# Altium PCB 80362201 Main v4.1.1.PcbDoc
Units mm, origin at the board's own origin, x right, y up, seen from the top; angles counter-clockwise.
Board outline 71.7 x 90.1 mm, 2 copper layers (Top Layer, Bottom Layer), stack 1.571 mm thick; 97 components, 61 nets, 324 pads, 171 vias.
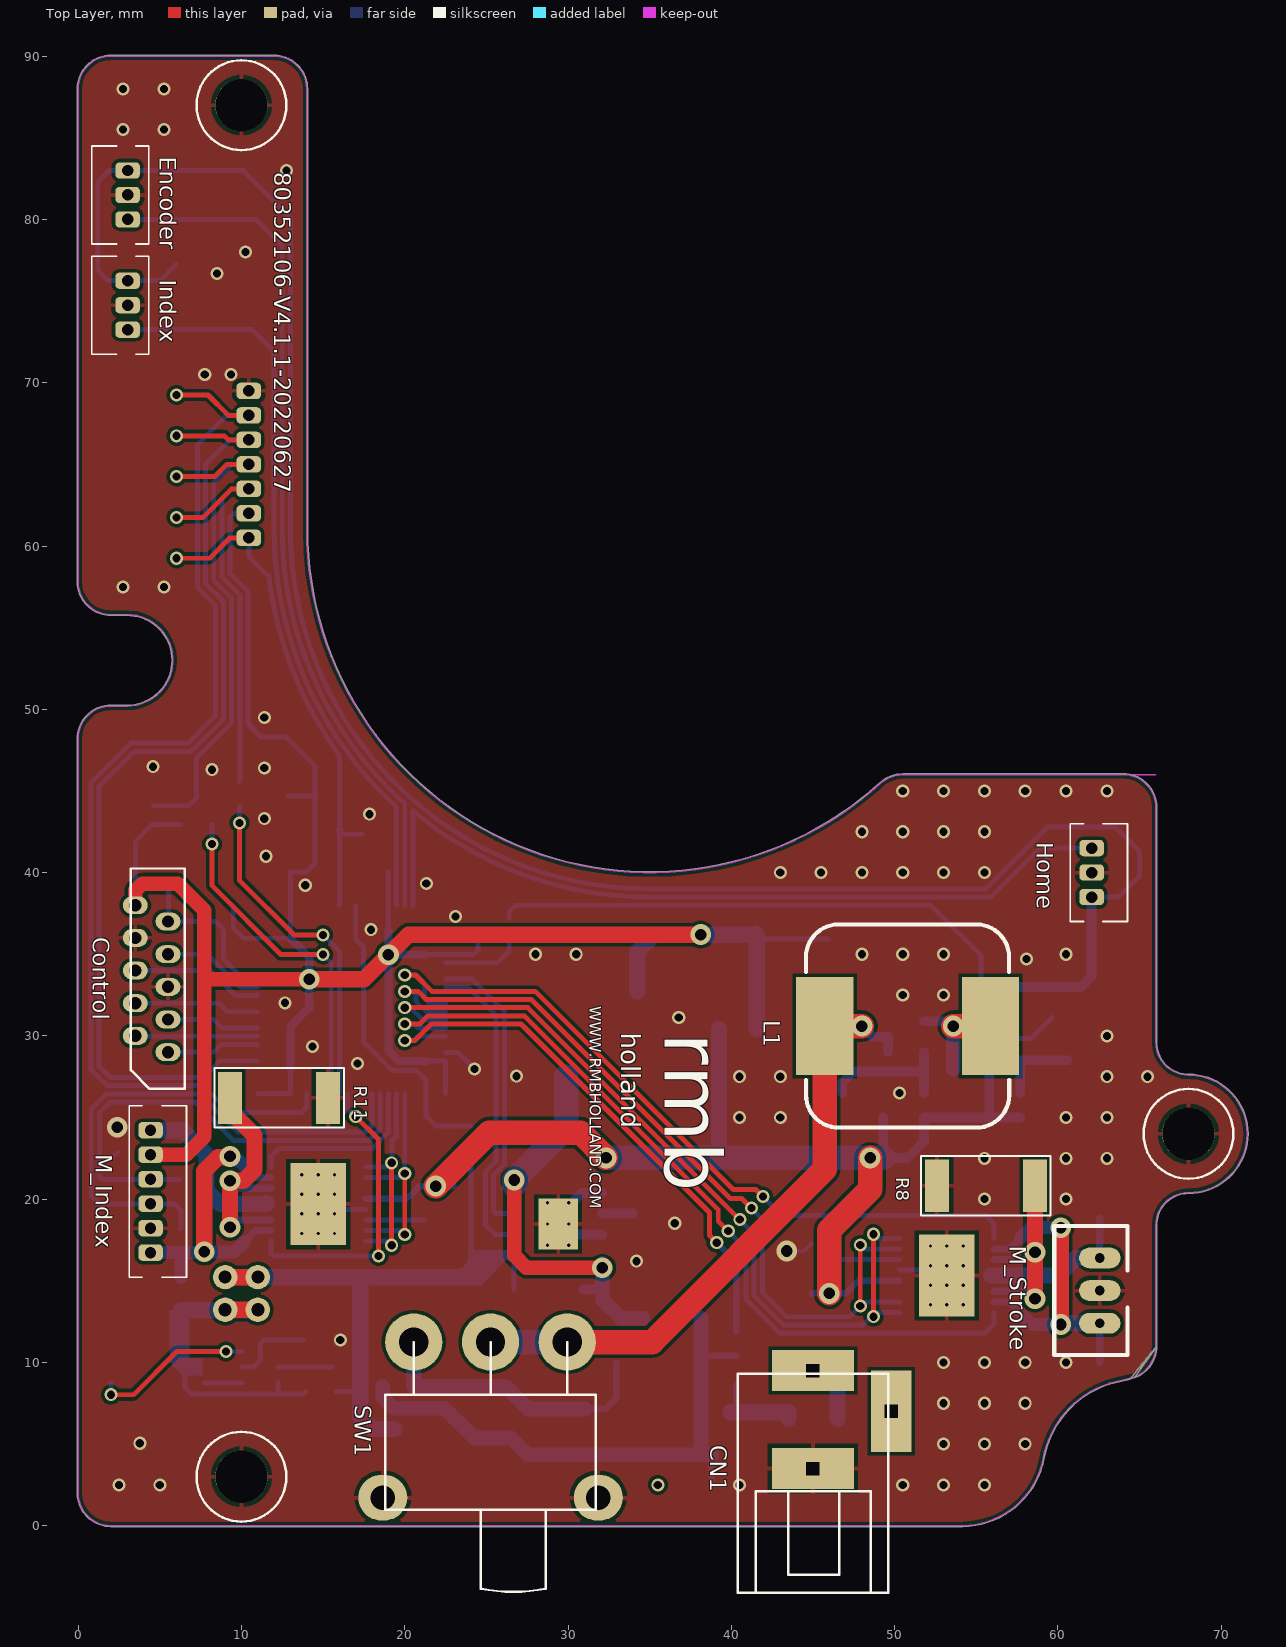
[diagram p0: Top Layer view]
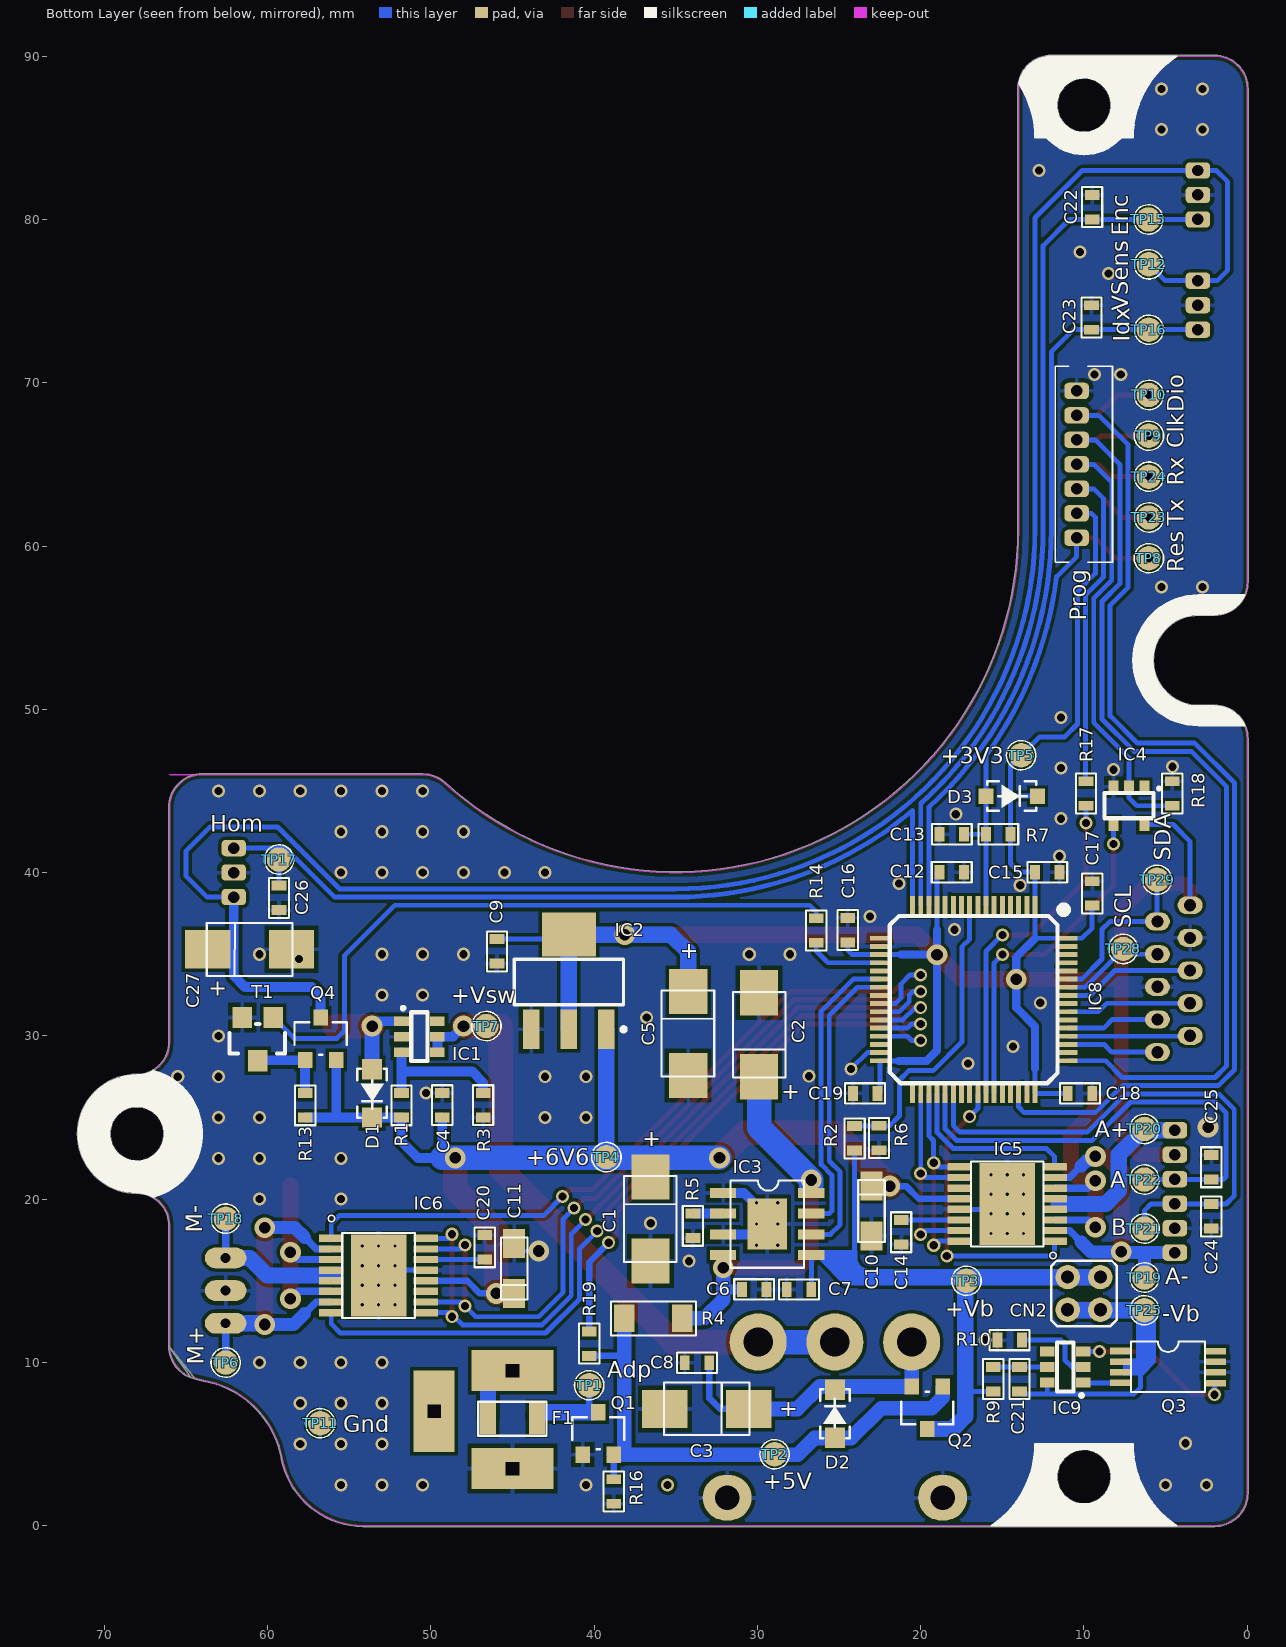
[diagram p1: Bottom Layer view, seen from below]
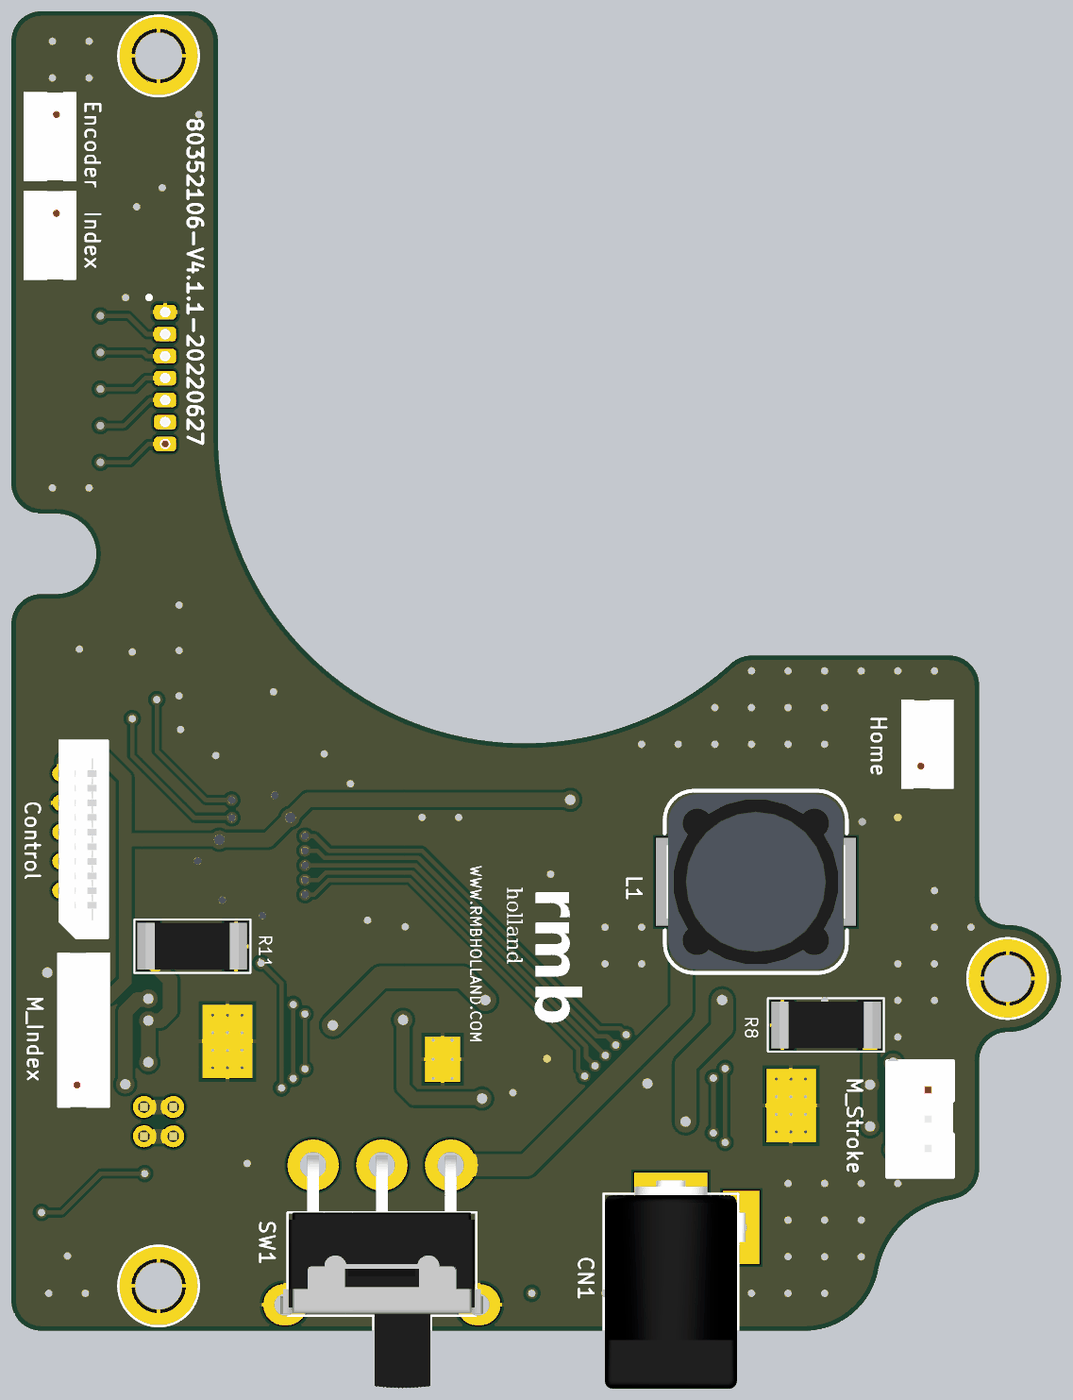
[diagram p2: 3D render of the assembled board from above, using the file's embedded part models]
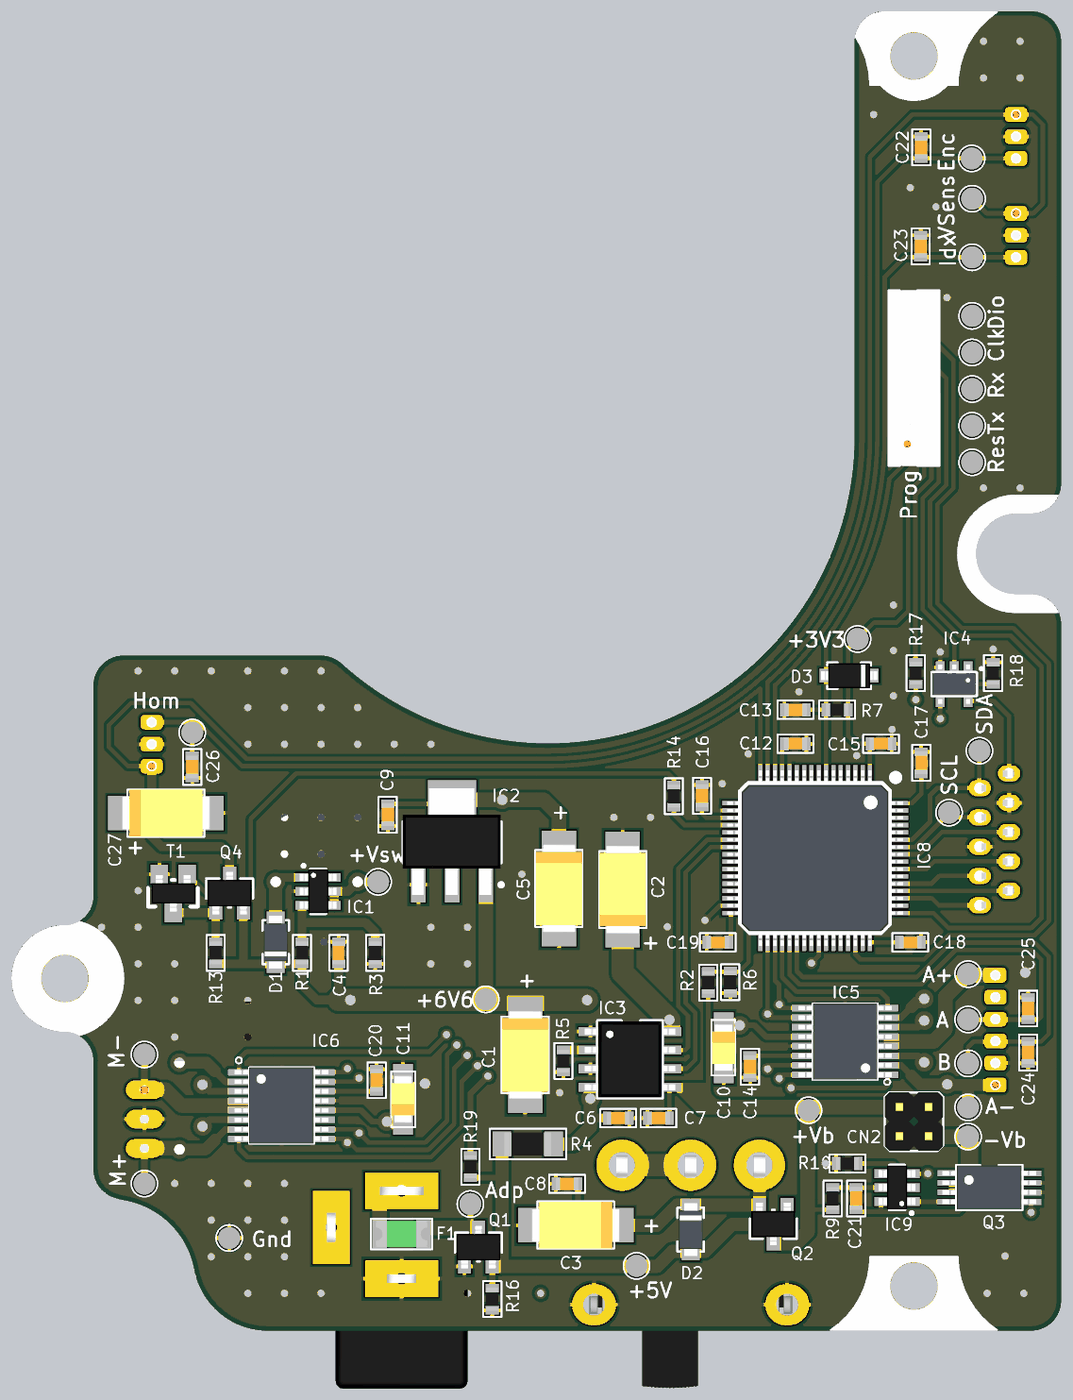
[diagram p3: 3D render of the assembled board from below, using the file's embedded part models]

## Layer stack, top to bottom
Top Solder: solder mask 0.0102, Solder Resist, Dk 3.5
Top Layer: signal copper 0.0356
Dielectric 1: dielectric 1.5, FR-4, Dk 4.8
Bottom Layer: signal copper 0.0356
Bottom Solder: solder mask 0.0102, Solder Resist, Dk 3.5

## Board outline
-0.05,48.2 cw(c2,48.2) 2,50.25 3,50.25 cw(c3,50.2) 3,50.25 ccw(c3.002,53) 5.751,53 ccw(c3.002,53) 3,55.75 cw(c3,55.8) 3,55.75 2,55.75 cw(c2,57.8) -0.05,57.8 -0.05,88 cw(c2,88) 2,90.05 12,90.05 cw(c12,88) 14.05,88 14.05,61 ccw(c14,61) 14.05,61 ccw(c35,61) 49.111,45.515 cw(c49.145,45.478) 49.112,45.516 cw(c50.551,43.847) 50.491,46.05 cw(c50.492,46) 50.492,46.05 64,46.05 cw(c64,46) 64.001,46.05 cw(c64,44) 66.05,44 cw(c66,44) 66.05,43.999 66.05,29.6 ccw(c68,29.6) 68,27.65 cw(c68,27.6) 68,27.65 cw(c68,24) 71.65,24 cw(c68,24) 68,20.35 ccw(c68,18.4) 66.05,18.4 66.05,11 cw(c66,11) 66.05,10.994 cw(c66,10.988) 66.05,10.994 cw(c64,10.988) 66.05,10.988 cw(c63,13.817) 64.683,9.055 63.918,8.85 cw(c63.909,8.9) 63.918,8.85 63.917,8.85 cw(c64.944,3.056) 63.917,8.85 63.918,8.85 ccw(c64.944,3.056) 59.167,4.174 cw(c59.117,4.184) 59.126,4.134 cw(c59.1,4.091) 59.151,4.091 cw(c59.1,4.091) 59.15,4.081 cw(c54.123,5.072) 54.184,-0.051 cw(c54.183,0) 54.176,-0.05 2,-0.05 cw(c2,2) -0.05,2

## Design rules (kind name [scope] priority, off if disabled: settings)
Clearance [All] p1: gap=0.2 ignorepadtopadclearanceinfootprint=FALSE
ComponentClearance [All] p1: gap=0 collisioncheckmode=3 verticalgap=0 showdistances=FALSE
HoleSize [All] p1: absolutevalues=TRUE maxlimit=3.5 minlimit=0.025 maxpercent=80.000 minpercent=20.000
HoleToHoleClearance [All] p1: gap=0.2 allowstackedmicrovias=TRUE
MinimumSolderMaskSliver [All] p1: minsoldermaskwidth=0
PolygonConnect [isvia] p1: thpad.connectstyle=Relief thpad.reliefconductorwidth=0.254 thpad.reliefentries=4 thpad.polygonreliefangle="90 Angle" thpad.airgapwidth=0.254 smdpad.connectstyle=Relief smdpad.reliefconductorwidth=0.254 smdpad.reliefentries=4 smdpad.polygonreliefangle="90 Angle" smdpad.airgapwidth=0.254 via.connectstyle=Direct via.reliefconductorwidth=0.254 via.reliefentries=4 via.polygonreliefangle="90 Angle" via.airgapwidth=0.254
PolygonConnect PolygonConnect_1 [All] p2: connectstyle=Relief reliefconductorwidth=0.254 reliefentries=4 polygonreliefangle="90 Angle" airgapwidth=0.254
RoomDefinition "80352106 Main v3.4.2" [InComponentClass('80352106 Main v3.4.2')] p1: confinementstyle=ConfineIn formatcopy=TRUE lockcomponents=FALSE outline -20,-6.9 71.475,-6.9 71.475,91.186 -20,91.186
RoutingVias [All] p1: holewidth=0.711 width=1.27 viastyle="Through Hole" minholewidth=0.5 minwidth=0.8 maxholewidth=0.711 maxwidth=1.27
SilkToSilkClearance [All] p1: silktosilkclearance=0
SilkToSolderMaskClearance [IsPad] p1: minsilkscreentomaskgap=0 clearancetoexposedcopper=TRUE
SolderMaskExpansion [All] p1: expansion=0.102 istentingtop=FALSE
Width [All] p1: maxlimit=1.5 minlimit=0.254 preferedwidth=0.254
24 further rules are at their usual default settings.

## Components (designator, comment, footprint, x,y, rotation, side; value= is the part's Value field where it differs from the comment)
C1 "220uF/10V" C/CAP_POL_6032-28 36.548,18.78 r90 bottom
C2 "220uF/10V" C/CAP_POL_6032-28 29.9,30.07 r270 bottom
C3 "220uF/10V" C/CAP_POL_6032-28 33.1,7.15 r180 bottom
C4 "1uF (105)" C/0603/H 49.3,25 r90 bottom
C5 "220uF/10V" C/CAP_POL_6032-28 34.242,30.149 r90 bottom
C6 "100nF (104)" C/0603/H 30.95,14.47 r180 bottom
C7 "10uF (106)" C/0603/H 26.7,14.47 r0 bottom
C8 "100nF (104)" C/0603/H 32.95,9.975 r0 bottom
C9 "100nF (104)" C/0603/H 45.95,35.925 r270 bottom
C10 "10uF/10V" C/CAP_POL_3216-18 23,19.275 r90 bottom
C11 "10uF/10V" C/CAP_POL_3216-18 44.9,15.75 r270 bottom
C12 "100nF (104)" C/0603/H 18.85,40.025 r180 bottom value=100p
C13 "10uF (106)" C/0603/H 17.345,42.35 r0 bottom
C14 "2.2uF (225)" C/0603/H 21.2,18.725 r270 bottom
C15 "100nF (104)" C/0603/H 13,40.025 r180 bottom
C16 "100nF (104)" C/0603/H 24.475,37.225 r270 bottom value=100p
C17 "100nF (104)" C/0603/H 9.5,39.475 r270 bottom
C18 "100nF (104)" C/0603/H 9.5,26.475 r0 bottom
C19 "100nF (104)" C/0603/H 22.65,26.475 r0 bottom value=100p
C20 "2.2uF (225)" C/0603/H 46.7,16.3 r90 bottom
C21 "100nF (104)" C/0603/H 13.95,9.725 r270 bottom
C22 "1nF (102)" C/0603/H 9.5,80 r90 bottom
C23 "1nF (102)" C/0603/H 9.537,73.25 r90 bottom
C24 "1nF (102)" C/0603/H 2.2,19.7 r270 bottom
C25 "1nF (102)" C/0603/H 2.2,21.2 r90 bottom
C26 "1nF (102)" C/0603/H 59.3,39.2 r270 bottom
C27 "220uF/10V" C/CAP_POL_6032-28 61.1,35.3 r0 bottom
CN1 "DC-005-2.5A-2.0" DC-005-2.5A-2.5 45,9.5 r0 top
CN2 "Header_Male_SMD_2x2P" Header2x2P_L10 9,13.225 r0 bottom
Control "0528061010" FPC_1.0-10P_STRAIGHT 5.5,29 r90 top
D1 "MBR230LSFT1G" SOD123LF 53.6,26.475 r270 bottom
D2 "MBR230LSFT1G" SOD123LF 25.254,6.85 r90 bottom
D3 "1N4148WS" SOD123 14.425,44.683 r180 bottom
Encoder "B3B-ZR" B3B-ZR 3.025,83 r270 top
F1 "FSMD150-1206R" F/1206R_PTC 45,6.55 r180 bottom
Home "B3B-ZR" B3B-ZR 62.069,38.5 r90 top
IC1 "MT3608" IC/SOT23-6L 50.7,29.95 r270 bottom
IC2 "AMS1117-3.3" SOT223/Rest 41.6,33.6 r270 bottom
IC3 "TP4056" HSOP-8 29.4,18.475 r180 bottom
IC4 "SN74LVC1G34DBVR" SOT753 7.25,44.1 r0 bottom
IC5 "DRV8833CPWPR" HTSSOP16 14.7,19.7 r0 bottom
IC6 "DRV8833CPWPR" HTSSOP16 53.2,15.325 r180 bottom
IC8 "STM32F103RCT6" LQFP64 16.75,32.225 r0 bottom
IC9 "DW01A" IC/SOT23-6L 11.15,9.725 r90 bottom
Index "B3B-ZR" B3B-ZR 3.025,76.25 r270 top
L1 "22uH/2A" COIL12X12 50.8,30.6 r90 top
M_Index "B6B-VH" B6B-ZR 4.431,16.725 r90 top
M_Stroke "B3B-PH-K-S" B3B-PH-KL 62.569,16.4 r270 top
Prog "B7B-ZR" B7B-ZR 10.45,60.5 r90 bottom
Q1 "SSM3J332R" SOT23-F 39.75,5.65 r270 bottom
Q2 "SSM3J332R" SOT23-F 19.604,7.225 r90 bottom
Q3 "FS8205A" TSSOP-8 4.85,9.725 r180 bottom
Q4 "SSM3J332R" SOT23-F 56.75,29.825 r270 bottom
R1 "11KΩ (1102) ±1%" R/0603/H 51.8,26.5 r270 bottom
R2 "9.1KΩ (9101) ±1%" R/0603/H 24.05,24.475 r270 bottom
R3 "1.5KΩ (1501) ±1%" R/0603/H 46.8,25 r90 bottom
R4 "0.0Ω (0R0) ±5%" R/1206/b 34.6,12.7 r0 bottom
R5 "1.5KΩ (152) ±5%" R/0603/H 33.949,17.615 r90 bottom
R6 "33KΩ (3302) ±1%" R/0603/H 22.55,23 r90 bottom
R7 "10KΩ (103) ±5%" R/0603/H 16,42.35 r180 bottom
R8 "0.2Ω (0R2) ±1%" R/2512 55.6,20.825 r0 top
R9 "100Ω (101) ±5%" r/0603/H 15.55,8.225 r90 bottom
R10 "1KΩ (102) ±5%" r/0603/H 15.303,11.368 r180 bottom
R11 "0.2Ω (0R2) ±1%" R/2512 12.3,26.2 r180 top
R13 "1KΩ (102) ±5%" R/0603/H 57.7,26.5 r270 bottom
R14 "1KΩ (102) ±5%" R/0603/H 26.4,35.7 r90 bottom
R16 "10KΩ (103) ±5%" R/0603/H 38.8,1.35 r90 bottom
R17 "100Ω (101) ±5%" r/0603/H 9.875,44.095 r90 bottom
R18 "10KΩ (103) ±5%" r/0603/H 4.595,44.095 r90 bottom
R19 "10KΩ (103) ±5%" r/0603/H 40.3,10.4 r90 bottom
SW1 "MS12AAH1/MS12ASG30" NKK_MS12AAH1 25.254,11.25 r0 top
T1 "BC817-40" T/NPN/TO23 60.6,29.8 r90 bottom
TP1 "Adp" TestPoint1.2 40.3,8.6 r180 bottom
TP2 "+5V" TESTPOINT1.2 28.95,4.375 r180 bottom
TP3 "+Vb" TESTPOINT1.2 17.2,15 r180 bottom
TP4 "+6V6" TESTPOINT1.2 39.25,22.575 r180 bottom
TP5 "+3V3" TESTPOINT1.2 13.85,47.183 r180 bottom
TP6 "M+" TestPoint1.2 62.569,9.994 r90 bottom
TP7 "+Vsw" TESTPOINT1.2 46.6,30.6 r180 bottom
TP8 "Res" TESTPOINT1.2 6.025,59.25 r0 bottom
TP9 "Clk" TESTPOINT1.2 6.025,66.75 r270 bottom
TP10 "Dio" TESTPOINT1.2 6.025,69.25 r270 bottom
TP11 "Gnd" TESTPOINT1.2 56.775,6.275 r180 bottom
TP12 "VSens" TESTPOINT1.2 6.025,77.25 r90 bottom
TP15 "Enc" TESTPOINT1.2 6.054,80 r90 bottom
TP16 "Idx" TESTPOINT1.2 6.025,73.25 r90 bottom
TP17 "Hom" TESTPOINT1.2 59.3,40.8 r90 bottom
TP18 "M-" TestPoint1.2 62.569,18.806 r90 bottom
TP19 "A-" TestPoint1.2 6.3,15.2 r90 bottom
TP20 "A+" TestPoint1.2 6.3,24.3 r90 bottom
TP21 "B" TestPoint1.2 6.3,18.2 r90 bottom
TP22 "A" TestPoint1.2 6.3,21.2 r90 bottom
TP23 "Tx" TestPoint1.2 6.025,61.75 r270 bottom
TP24 "Rx" TestPoint1.2 6.025,64.25 r270 bottom
TP25 "-Vb" TestPoint1.2 6.3,13.2 r90 bottom
TP28 "SCL" TestPoint1.2 7.6,35.325 r90 bottom
TP29 "SDA" TestPoint1.2 5.525,39.555 r90 bottom

## Footprints (in the part's own frame and the unit in brackets; to place one, negate y for a bottom-side part, rotate by r counter-clockwise, add the part's x,y. Pads: shape width x height; smd on the part's side, far side on the other; paste and mask are expansions set on the pad)
B3B-PH-KL [mm]
  oval 1.27x2.54 hole 0.6: 1(0,0) 2(2,0) 3(4,0)
  silkscreen extent -1.95,-2.8 5.95,1.7, body extent -1.95,-2.8 5.95,1.7, height 6
B3B-ZR [mm]
  rrect50% 1x1.5 hole 0.7: 1(0,0) 2(1.5,0) 3(3,0)
  silkscreen extent -1.5,-2.2 4.5,1.3, body extent -1.5,-2.2 4.5,1.3, height 4.5
B6B-ZR [mm]
  rrect50% 1x1.5 hole 0.7: 1(0,0) 2(1.5,0) 3(3,0) 4(4.5,0) 5(6,0) 6(7.5,0)
  silkscreen extent -1.5,-2.2 9,1.3, body extent -1.5,-2.2 9,1.3, height 4.5
B7B-ZR [mm]
  rrect50% 1x1.5 hole 0.7: 1(0,0) 2(1.5,0) 3(3,0) 4(4.5,0) 5(6,0) 6(7.5,0) 7(9,0)
  silkscreen extent -1.5,-2.2 10.5,1.3, body extent -1.5,-2.2 10.5,1.3, height 4.5
C/0603/H [mm]
  rect 0.6x0.9 smd: 1(0,0) 2(1.5,0)
  silkscreen extent -0.47,-0.62 1.98,0.62, body extent -0.03,-0.42 1.52,0.43, height 0.65
C/CAP_POL_3216-18 [mm]
  rect 1.78x1.35 smd: 1(-1.525,0) 2(1.525,0)
  silkscreen extent -1.9,-0.8 1.9,0.82, body extent -1.6,-0.8 1.6,0.8, height 1.63
C/CAP_POL_6032-28 [mm]
  rect 2.77x2.35 smd: 1(-2.57,0) 2(2.57,0)
  silkscreen extent -2.63,-1.6 2.63,1.63, body extent -3,-1.6 3,1.6, height 2.63
COIL12X12 [mm]
  rect 6x3.5 smd: 1(0,5.08) 2(0,-5.08)
  silkscreen extent -6.22,-6.22 6.22,6.23, body extent -6,-6.1 6,6.1, height 7.8
DC-005-2.5A-2.5 [mm]
  rect 5x2.5 hole 0.8 square: 1(0,0) 2(0,-6)
  rect 2.5x5 hole 0.8 square: 3(4.8,-2.5)
  silkscreen extent -4.6,-13.6 4.6,-0.2, body extent -4.5,-13.5 5.1,0.7, height 11
F/1206R_PTC [mm]
  rect 1x1.9 smd: 1(-1.5,0) 2(1.5,0)
  silkscreen extent -2.1,-1.04 2.09,1.04, body extent -1.75,-0.9 1.75,0.9, height 0.53
FPC_1.0-10P_STRAIGHT [mm]
  oval 1.1x1.524 hole 0.75: 1(0,0) 2(1,2) 3(2,0) 4(3,2) 5(4,0) 6(5,2) 7(6,0) 8(7,2) 9(8,0) 10(9,2)
  silkscreen extent -2.25,-1.02 11.25,2.27, body extent -2.25,-1.02 11.25,2.28, height 5.4
Header2x2P_L10 [mm]
  round 1.5 hole 0.8: 1(0,0) 2(0,-2) 3(2,-2) 4(2,0)
  silkscreen extent -1,-3 3,1, body extent -1,-3 3,1, height 7.2
HSOP-8 [mm]
  rect 1.6x0.61 smd: 1(-2.7,1.905) 2(-2.7,0.635) 3(-2.7,-0.635) 4(-2.7,-1.905) 5(2.7,-1.905) 6(2.7,-0.635) 7(2.7,0.635) 8(2.7,1.905)
  rect 2.4x3.1 smd paste-5 mask+0.05: G(0,0)
  rect 2.4x3.1 smd far side paste-5 mask+0.05: G(0,0)
  silkscreen extent -2.25,-2.68 2.25,2.68, body extent -3.09,-2.6 3.11,2.6, height 1.66
HTSSOP16 [mm]
  rrect10% 1.5x0.45 smd mask+0.05: 1(-2.9,2.275) 2(-2.9,1.625) 3(-2.9,0.975) 4(-2.9,0.325) 5(-2.9,-0.325) 6(-2.9,-0.975) 7(-2.9,-1.625) 8(-2.9,-2.275) 9(2.9,-2.275) 10(2.9,-1.625) 11(2.9,-0.975) 12(2.9,-0.325) 13(2.9,0.325) 14(2.9,0.975) 15(2.9,1.625) 16(2.9,2.275)
  rect 3.4x5 smd paste-5 mask+0.05: 17(0,0)
  rect 3.4x5 smd far side paste-5 mask+0.05: 17(0,0)
  silkscreen extent -2.23,-2.6 2.23,2.61, body extent -3.2,-2.6 3.2,2.6, height 1.2
IC/SOT23-6L [mm]
  rect 0.6x0.9 smd: 1(-0.95,-1.1) 2(0,-1.1) 3(0.95,-1.1) 4(0.95,1.1) 5(0,1.1) 6(-0.95,1.1)
  silkscreen extent -1.82,-1.08 1.5,0.5, body extent -1.5,-1.25 1.5,1.25, height 1.1
LQFP64 [mm]
  rect 0.3x1.2 smd: 1(-3.75,-5.75) 2(-3.25,-5.75) 3(-2.75,-5.75) 4(-2.25,-5.75) 5(-1.75,-5.75) 6(-1.25,-5.75) 7(-0.75,-5.75) 8(-0.25,-5.75) 9(0.25,-5.75) 10(0.75,-5.75) 11(1.25,-5.75) 12(1.75,-5.75) 13(2.25,-5.75) 14(2.75,-5.75) 15(3.25,-5.75) 16(3.75,-5.75) 33(3.75,5.75) 34(3.25,5.75) 35(2.75,5.75) 36(2.25,5.75) 37(1.75,5.75) 38(1.25,5.75) 39(0.75,5.75) 40(0.25,5.75) 41(-0.25,5.75) 42(-0.75,5.75) 43(-1.25,5.75) 44(-1.75,5.75) 45(-2.25,5.75) 46(-2.75,5.75) 47(-3.25,5.75) 48(-3.75,5.75)
  rect 1.2x0.3 smd: 17(5.75,-3.75) 18(5.75,-3.25) 19(5.75,-2.75) 20(5.75,-2.25) 21(5.75,-1.75) 22(5.75,-1.25) 23(5.75,-0.75) 24(5.75,-0.25) 25(5.75,0.25) 26(5.75,0.75) 27(5.75,1.25) 28(5.75,1.75) 29(5.75,2.25) 30(5.75,2.75) 31(5.75,3.25) 32(5.75,3.75) 49(-5.75,3.75) 50(-5.75,3.25) 51(-5.75,2.75) 52(-5.75,2.25) 53(-5.75,1.75) 54(-5.75,1.25) 55(-5.75,0.75) 56(-5.75,0.25) 57(-5.75,-0.25) 58(-5.75,-0.75) 59(-5.75,-1.25) 60(-5.75,-1.75) 61(-5.75,-2.25) 62(-5.75,-2.75) 63(-5.75,-3.25) 64(-5.75,-3.75)
  silkscreen extent -5.7,-5.7 5.15,5.13, body extent -6,-6 6,6, height 1.6
NKK_MS12AAH1 [mm]
  round 3.5 hole 1.8: 1(4.7,0) 2(0,0) 3(-4.7,0)
  oval 3x2.8 hole 1.5: G(-6.6,-9.53) G(6.6,-9.53)
  silkscreen extent -6.45,-15.3 6.45,0, body extent -6.93,-15.23 6.93,0.64, height 7.3
R/0603/H [mm]
  rect 0.6x0.9 smd: 1(0,0) 2(1.5,0)
  silkscreen extent -0.47,-0.62 1.98,0.62, body extent -0.03,-0.42 1.52,0.43, height 0.45
r/0603/H [mm]
  rect 0.6x0.9 smd: 1(0,0) 2(1.5,0)
  silkscreen extent -0.47,-0.62 1.98,0.62, body extent -0.03,-0.42 1.52,0.43, height 0.45
R/1206/b [mm]
  rect 1.25x1.7 smd: 1(0,0) 2(3.55,0)
  silkscreen extent -0.84,-1.04 4.37,1.04, body extent 0.18,-0.79 3.38,0.81, height 0.53
R/2512 [mm]
  rect 1.475x3.2 smd: 1(-3,0) 2(3,0)
  silkscreen extent -3.98,-1.83 3.95,1.83, body extent -3.17,-1.6 3.18,1.6, height 0.58
SOD123 [mm]
  rect 0.9x0.95 smd: A(-1.575,0) K(1.575,0)
  silkscreen extent -1.5,-0.9 1.5,0.9, body extent -1.92,-0.85 1.93,0.85, height 1.1
SOD123LF [mm]
  rect 1.25x1.22 smd: A(-1.475,0) K(1.475,0)
  silkscreen extent -1.5,-0.9 1.5,0.9, body extent -1.8,-0.83 1.8,0.83, height 0.95
SOT23-F [mm]
  rect 1x0.9 smd: D(-1.3,0) G(1.3,-0.95) S(1.3,0.95)
  silkscreen extent -1,-1.6 0.97,1.6, body extent -1.45,-1.5 1.45,1.5, height 1.05
SOT223/Rest [mm]
  rect 2.4x1 smd: 1(3.2,-2.25) 2(3.2,0.05) 3(3.2,2.35)
  rect 2.7x3.3 smd: 2(-2.6,0.05)
  silkscreen extent -1.1,-3.3 3.32,3.52, body extent -3.4,-3.33 3.9,3.37, height 1.8
SOT753 [mm]
  rect 0.6x0.8 smd: 1(-0.95,-1.15) 2(0,-1.15) 3(0.95,-1.15) 4(0.95,1.15) 5(-0.95,1.15)
  silkscreen extent -1.9,-1.1 1.5,0.77, body extent -1.48,-1.35 1.48,1.35, height 1.1
T/NPN/TO23 [mm]
  rect 1.3x1.2 smd: B(1.325,-0.95) C(-1.325,0) E(1.325,0.95)
  silkscreen extent -0.89,-1.67 0.92,1.73, body extent -1.23,-1.5 1.27,1.5, height 1.1
TestPoint1.2 [mm]
  round 1.5 smd: 1(0,0)
  silkscreen extent -0.9,-0.9 0.9,0.9
TESTPOINT1.2 [mm]
  round 1.5 smd: 1(0,0)
  silkscreen extent -0.9,-0.9 0.9,0.9
TSSOP-8 [mm]
  rect 1.35x0.4 smd mask+0.05: 1(-2.875,0.975) 2(-2.875,0.325) 3(-2.875,-0.325) 4(-2.875,-0.975) 5(2.866,-0.988) 6(2.866,-0.338) 7(2.866,0.312) 8(2.866,0.962)
  silkscreen extent -2.27,-1.55 2.27,1.55, body extent -3.2,-1.5 3.2,1.5, height 1.2

## Part data
C1 C2 C3 C5 C10 C11 C27: library part C/CAP_Pol, "CapacitorPol", Size="Ø15x33 Pitch 8"
C4 C6 C7 C8 C9 C13 C14 C15 C17 C18 C20 C21 C22 C23 C24 C25 C26: library part CAP, "Capacitor"
  C4 C6 C7 C8 C9 C14 C20 C21 C22 C23 C24 C25 C26: Size=SMD1206
C12 C16 C19: library part "Capacitor non polarized", "Capacitor non polarized", Case/Format=0603, Manufacturer=Generic, Tolerance=10%, Type="SMD Chip Capacitor"
CN1: library part DC_Power_Jack, "XKB_DC-005-2.5A-2.0_Power jack", Brand=E-Switch
CN2: library part CON2*2, "Connector", Brand=Molex
Control: library part CON10, "Molex_0528061010_FPC 1.0 10P Connector", System=Connector
D1: library part DIODE_SHOTTKY, "Diode", Brand="OnSemi or similar", Size="DO41 Pitch 10"
D2: library part DIODE_SHOTTKY, "ON semiconductor_MBR230LSFT1G_Diode", Brand="OnSemi or similar", Size="DO41 Pitch 10"
D3: library part DIODE, "Diode", Brand="OnSemi or similar", Size="DO41 Pitch 10"
Encoder Home Index M_Stroke: library part CON3, "Connector", Brand="JST or similar"
F1: library part PTC, "Fuzetec PTC fuse 2.5 A 16V", Brand="LittelFuse or similar", Size="Pitch 10mm"
IC1: library part IC/MT3608, "Aerosemi_MT3608_Boost converter", Brand="TI or similar", Size=SOP8
IC2: library part IC/ASM1117-SOT223, "AMS_AMS1117-3.3_Voltage regulator", Brand="AMS-Semitec or similar", Size=SOT223
IC3: library part IC/TP4056, "Top power_TP4056-42-SOP8-PP_18650 charger", Brand="TI or similar", Size=SOP8
IC4: library part LogicLevelShifter, "Bus buffer", Brand=TI, Dimension=SOT753
IC5 IC6: library part IC/DRV8833CPWPR, "TI_DRV8833CPWPR_DC/Stepper motor driver", Brand=TI, Size=HSOP8
IC8: library part IC/STM32F100RBT6, "ST_STM32F103RCT6_Microprocessor"
IC9: library part IC/DW01A, "Protection circuit", Brand="ST or similar", Size=SO8
L1: library part INDUCTOR1, "INDUCTOR", Size=SMD1206
M_Index: library part CON6, "Connector", Brand="JST or similar"
Prog: library part CON7, "Connector", Brand="JST or similar"
Q1: library part MOSFET-P-CHANNEL, "Toshiba_SSM3J332R_P-Channel MOSFET", Brand="ST or similar", Size=TO220
Q2: library part MOSFET-P-CHANNEL, "N-Channel MOSFET", Brand="ST or similar", Size=TO220
Q3: library part MOSFET-N-P-DUAL, "N-P-Channel MOSFET", Brand="ST or similar", Size=SO8
Q4: library part MOSFET-P-CHANNEL, "P-Channel MOSFET", Brand=AOS, Dimension=SOT23
R1 R2 R3 R4 R5 R6 R9 R10 R13 R14 R17 R18 R19: library part RES, "Resistor"
  R1 R2 R3 R4 R5 R6 R9 R10: coding=11201312000153, name=贴片电阻, Size=SMD1206
  R13 R14 R17 R18 R19: Brand=YAGEO/relac/walsin, Dimension=0603
R7 R8 R11 R16: library part RES
SW1: library part SW-SPDT, "NKK_MS12AAH1/MS12ASG30_Slide switch", Brand=E-Switch
T1: library part T/NPN, "Transistor NPN", Brand=DC, Dimension=TO23
TP1 TP2 TP3 TP4 TP5 TP6 TP7 TP8 TP9 TP10 TP11 TP12 TP15 TP16 TP17 TP18 TP19 TP20 TP21 TP22 TP23 TP24 TP25 TP28 TP29: library part TestPoint

## Free pads (board coordinates)
  round 3.2 hole 3.2: ""(10,87) ""(10,3) ""(68,24)

## Via types
v1: diameter 0.8, hole 0.5, Top Layer to Bottom Layer, tented both sides, 115 vias
v2: diameter 0.2, hole 0.2, Top Layer to Bottom Layer, 30 vias
v3: diameter 1.27, hole 0.711, Top Layer to Bottom Layer, tented both sides, 21 vias
v4: diameter 0.8, hole 0.5, Top Layer to Bottom Layer, tented top, 5 vias

## Nets (pads, with @x,y where several pads share a name; then routed paths per layer and width w, separated by ;. In a path a pad name is that pad's centre, name@x,y a point inside that pad or via, vN(x,y) a via of type N, cw(c..) or ccw(c..) an arc to the next point about the centre after c; other vN are vias at no path point)
+3V3: C5.2 C9.1 C12.1 C15.1 C16.2 C17.2 C18.2 C19.1 Control.10 D3.K IC2.2 IC4.5 IC8.1 IC8.13 IC8.19 IC8.32 IC8.48 IC8.64 M_Index.5 Prog.2 R7.2 TP5.1 | length 155.2
  Top Layer w0.9: Control.10 3.5,38.9 3.925,39.325 6.1,39.325 7.725,37.7 7.725,23.825 6.625,22.725 M_Index.5 ; 8,33.475 v3@14.148,33.475
  Top Layer w1: v3@14.148,33.475 17.5,33.475 v3(19,34.975) 20.226,36.201 v3(38.124,36.201)
  Bottom Layer w0.3: Control.10 3.5,41.9 4.55,42.95 IC4.5 ; C17.2 9.5,36.6 10.125,35.975 IC8.64 13,35.975 IC8.1 C15.1 13.975,40.025 14.5,40.55 R7.2 14.5,44.683 ; Prog.2 9.55,62 9.3,61.75 9.3,58.321 10.4,57.221 10.4,49.1 11.2,48.3 12.733,48.3 TP5.1 14.5,46.533 14.5,44.683 ; C18.2 IC8.48 13,28 ; D3.K 14.5,44.683 ; 19,36.5 19,37.437 IC8.13 C12.1@19,40.025 ; 21.2,34.975 IC8.19 24.2,34.975 24.475,35.25 C16.2 ; 21.35,28.467 21.955,28.467 21.962,28.475 IC8.32 C19.1@22.5,26.475 ; IC2.2@41.498,36.252 IC2.2@41.524,36.226 ; IC2.2@42,35.925 C9.1
  Bottom Layer w0.5: 13,28 13,30.575 14.15,31.725 14.15,34.825 13,35.975 ; 19,36.5 v3(19,34.975) ; 21.2,34.977 19.002,34.977 v3(19,34.975) ; 21.35,28.467 19.633,28.467 19,29.1 v3(19,34.975)
  Bottom Layer w1: C5.2 34.242,35.142 35.3,36.2 v3(38.124,36.201) 41.445,36.2 IC2.2@41.498,36.252 ; IC2.2@41.524,36.226 41.55,36.2 IC2.2@41.55,30.4
  other v3: 14.148,33.473
+5V: C1.2 C4.1 C10.2 C11.2 D1.K IC2.3 IC5.12 IC6.12 Q4.S R1.2 R13.2 TP4.1 | length 74.4
  Top Layer w1.5: v3(21.9,20.8) 25.18,24.08 30.77,24.08 v3(32.325,22.525) ; v3(46,14.225) 46,18.1 48.5,20.6 v3(48.5,22.525)
  Bottom Layer w0.4: IC5.12 20.125,20.025 20.9,20.8 v3(21.9,20.8) v3@21.925,20.8 ; v3@22,20.725 v3@21.925,20.8 ; C10.2 v3@21.925,20.8 ; C11.2 v3@45.975,14.225 ; v3(46,14.225) 47,14.225 47.775,15 IC6.12
  Bottom Layer w0.6: C4.1 49.3,22.525 50.8,22.525 51.8,23.525 R1.2 D1.K 55.8,25 ; Q4.S@55.8,28.5 55.8,25 ; R13.2 55.8,25
  Bottom Layer w1: TP4.1 IC2.3
  Bottom Layer w1.5: v3(32.325,22.525) TP4.1@39.2,22.525 ; TP4.1 TP4.1@39.2,22.525 ; 49.3,22.525 v3(48.5,22.525) TP4.1@39.2,22.525
+Vadp: D2.A Q1.S Q2.G R4.2 R16.2 R19.1 TP2.1 | length 34.3
  Bottom Layer w0.4: 38.15,10.4 R19.1 ; R16.2 Q1.S
  Bottom Layer w0.9: Q2.G 18.654,7.871 19.325,7.2 22.425,7.2 24.25,5.375 D2.A 26.5,5.375 27.525,4.35 38.15,4.35 ; R4.2 38.15,10.4 38.15,4.35 ; Q1.S 38.15,4.35
A: C25.1 IC8.37 M_Index.4 TP22.1 | length 29.8
  Bottom Layer w0.3: TP22.1@6.2,21.2 4.431,21.2 1.476,21.2 1.3,21.376 1.3,25.292 1.956,25.948 7.152,25.948 9.5,23.6 17.807,23.6 18.5,24.293 IC8.37
A1: IC5.9 IC5.16 IC8.35 | length 12.8
  Top Layer w0.3: v1(19.2,17.175) v1(19.2,22.225)
  Bottom Layer w0.3: IC5.16 18.95,17.425 v1(19.2,17.175) ; IC5.9 18.95,21.975 19.214,22.239 19.214,23.589 19.5,23.875 IC8.35
A2: IC5.10 IC5.15 IC8.34 | length 13.7
  Top Layer w0.3: v1(20,17.825) v1(20,21.575)
  Bottom Layer w0.3: IC5.15 19.75,18.075 v1(20,17.825) ; IC5.10 19.75,21.325 v1(20,21.575) IC8.34
Adp: F1.2 Q1.D TP1.1 | length 5.6
  Bottom Layer w0.4: 40.3,6.95 TP1.1
  Bottom Layer w1: Q1.D@39.95,6.95 40.3,6.95 43.5,6.95 F1.2
B: C24.1 IC8.38 M_Index.3 TP21.1 | length 33
  Bottom Layer w0.3: TP21.1 6.3,19.3 5.9,19.7 4.431,19.7 C24.1 1.3,19.7 0.8,20.2 0.8,25.499 1.749,26.448 7.452,26.448 7.5,26.4 9.8,24.1 17.6,24.1 18,24.5 IC8.38
B-: C21.2 CN2.1 CN2.4 IC9.6 Q3.2 Q3.3 TP25.1 | length 16.4
  Top Layer w1: CN2.1 CN2.4
  Bottom Layer w0.3: 6.55,9.855 6.55,8.46 6.935,8.075 12.25,8.075 ; IC9.6 12.25,8.075 ; C21.2 13.8,8.075 13.475,8.075 12.25,8.075
  Bottom Layer w1: TP25.1 9,13.2 10.975,13.2 CN2.4
BattVoltage: IC8.9 R2.1 R6.2 | length 18.5
  Bottom Layer w0.3: IC8.9 17,35.925 17.475,35.45 17.475,29.625 19.233,27.867 20.733,27.867 21.3,27.3 21.3,25.1 21.925,24.475 22.55,24.475 R2.1
Charging: IC3.7 IC8.22 | length 18.2
  Bottom Layer w0.3: IC8.22 24.125,33.475 26.1,31.5 26.1,22.129 25.438,21.467 25.438,19.286 25.614,19.11 IC3.7
FaultIdx: IC5.8 IC8.36 | length 10.8
  Bottom Layer w0.3: IC5.8 11.8,22.6 12.3,23.1 17.4,23.1 18.014,23.1 19,24.086 IC8.36
FaultStr: IC6.8 IC8.28 | length 50.1
  Top Layer w0.3: v1(20,30.725) 20.918,30.725 21.418,31.225 27.329,31.225 39.2,19.354 39.2,18.654 39.719,18.135 v1(39.814,18.039)
  Bottom Layer w0.3: v1(20,30.725) 20.575,30.725 20.825,30.475 IC8.28 ; v1(39.814,18.039) 40.9,16.954 40.9,13.876 42.976,11.8 55.54,11.8 56.1,12.36 IC6.8
GND: C1.1 C2.1 C3.1 C4.2 C5.1 C6.2 C7.2 C8.2 C9.2 C10.1 C11.1 C12.2 C13.2 C14.2 C15.2 C16.1 C17.1 C18.1 C19.2 C20.2 C22.2 C23.2 C24.2 C25.2 C26.2 C27.1 CN1.2 Control.5 Control.8 Encoder.2 Home.2 IC1.2 IC2.1 IC3.1 IC3.3 IC3.G IC4.3 IC5.13 IC5.17 IC6.13 IC6.17 IC8.12 IC8.18 IC8.31 IC8.47 IC8.60 IC8.63 Index.2 M_Index.2 M_Stroke.2 pad. Prog.7 Q1.G Q3.6 Q3.7 R3.1 R5.1 R6.1 R8.1 R10.1 R11.1 R16.1 R18.2 SW1.G T1.E TP11.1 | length 12.6
  Bottom Layer w0.254: v3(43.4,16.825) 44.45,16.825 C11.1
  Bottom Layer w0.3: C25.2 2.25,22.7 C25.2@2.4,22.85 ; IC5.17@15.433,19.375 IC5.13 ; IC8.31 23.275,28.975 v1(24.275,27.975) ; IC6.13 IC6.17@51.625,15.65
  Bottom Layer w0.6: IC3.G@29.6,17.84 IC3.3 ; IC3.G@30,19.55 30.83,20.38 IC3.1
  other v1: 2.5,2.5 5,2.5 40.5,2.5 50.5,2.5 53,2.5 55.5,2.5 53,5 55.5,5 58,5 3.775,5.05 53,7.5 55.5,7.5 58,7.5 53,10 55.5,10 58,10 60.5,10 16.053,11.368 34.2,16.2 36.535,18.522 55.5,20 60.5,20 55.5,22.5 60.5,22.5 63,22.5 40.5,25 43,25 60.5,25 63,25 50.298,26.5 40.5,27.5 43,27.5 63,27.5 65.5,27.5 26.85,27.53 17.1,28.3 14.35,29.35 63,30 36.783,31.119 12.675,32.025 50.5,32.5 53,32.5 58.07,34.7 28,35 30.5,35 48,35 50.5,35 53,35 60.5,35 17.931,36.503 23.1,37.301 13.907,39.226 21.32,39.338 43,40 45.5,40 48,40 50.5,40 53,40 55.5,40 11.5,41 48,42.5 50.5,42.5 53,42.5 55.5,42.5 11.4,43.3 17.85,43.575 50.5,45 53,45 55.5,45 58,45 60.5,45 63,45 8.2,46.3 11.4,46.4 4.586,46.486 11.4,49.5 2.75,57.5 5.25,57.5 7.75,70.5 9.35,70.5 8.5,76.7 10.25,78 12.75,83 2.75,85.5 5.25,85.5 2.75,88 5.25,88
  other v2: 52.2,13.525 53.2,13.525 54.2,13.525 52.2,14.725 53.2,14.725 54.2,14.725 52.2,15.925 53.2,15.925 54.2,15.925 52.2,17.125 53.2,17.125 54.2,17.125 28.75,17.175 30.05,17.175 13.7,17.9 14.7,17.9 15.7,17.9 28.75,18.475 30.05,18.475 13.7,19.1 14.7,19.1 15.7,19.1 28.75,19.775 30.05,19.775 13.7,20.3 14.7,20.3 15.7,20.3 13.7,21.5 14.7,21.5 15.7,21.5
  other v3: 2.4,24.4
I2C1-SCL: Control.7 IC8.58 TP28.1 | length 6.3
  Bottom Layer w0.3: Control.7 7.9,35 9.925,32.975 IC8.58
I2C1-SDA: Control.9 IC8.59 TP29.1 | length 10.6
  Bottom Layer w0.3: TP29.1 5.525,38.03 5.525,37 8.425,37 8.9,36.525 8.9,34.707 10.132,33.475 IC8.59
Idx+: IC5.4 IC5.5 M_Index.6 TP20.1 | length 10.3
  Bottom Layer w1: M_Index.6 6.375,24.225 7.863,22.737 7.863,20.506 8.668,19.7 11.5,19.7 11.55,19.75
Idx-: IC5.2 IC5.7 M_Index.1 TP19.1 | length 19.5
  Top Layer w1: v3(7.725,16.775) 7.725,21.725 8.563,22.563 9.248,22.563 v3(9.3,22.615)
  Bottom Layer w0.45: 10.168,17.368 10.875,18.075 IC5.2 ; 10.168,22.032 10.875,21.325 IC5.7
  Bottom Layer w0.8: M_Index.1@4.331,16.625 M_Index.1 6.3,16.725 ; TP19.1 6.3,16.725 ; v3(9.3,22.615) 9.427,22.615 9.682,22.36 9.84,22.36 10.168,22.032 ; 10.168,17.368 9.575,16.775 v3(7.725,16.775) 7.675,16.725 6.3,16.725
IntEncoder: C22.1 Encoder.3 IC8.15 TP15.1 | length 52.7
  Bottom Layer w0.3: Encoder.3 TP15.1 8.227,80 C22.1 10.9,80 12.5,78.4 12.5,61.002 ccw(c35,61) 20,44.229 IC8.15
IntHome: C26.1 Home.3 IC8.16 TP17.1 | length 51.5
  Bottom Layer w0.3: IC8.16 20.5,43.795 ccw(c35,61) 35,38.5 55.894,38.5 58.894,41.5 Home.3 ; C26.1 TP17.1
IntIndex: C23.1 IC8.14 Index.3 TP16.1 | length 45.6
  Bottom Layer w0.3: Index.3 TP16.1 8.037,73.25 C23.1 10.65,73.25 12,71.9 12,61.002 ; 12,61 ccw(c35,61) 19.5,44.007 IC8.14
MotFWD: IC6.9 IC6.16 IC8.27 | length 50.4
  Top Layer w0.3: v1(20,31.725) 27.543,31.725 v1(40.522,18.747) ; v1(48.7,12.8) v1(48.7,17.85)
  Bottom Layer w0.3: v1(20,31.725) 20.341,31.725 21.091,30.975 IC8.27 ; v1(40.522,18.747) 41.4,17.868 41.4,14.083 43.183,12.3 48.065,12.3 48.565,12.8 v1(48.7,12.8) 48.95,13.05 IC6.9 ; v1(48.7,17.85) 48.95,17.6 IC6.16
MotREV: IC6.10 IC6.15 IC8.26 | length 51.1
  Top Layer w0.3: v1(20,32.725) 20.829,32.725 21.329,32.225 27.75,32.225 39.934,20.041 40.641,20.041 v1(41.229,19.454) ; v1(47.9,13.45) v1(47.9,17.2)
  Bottom Layer w0.3: v1(20,32.725) 20.475,32.725 20.7,32.5 20.7,32.1 21.325,31.475 IC8.26 ; v1(41.229,19.454) 41.9,18.782 41.9,14.29 43.39,12.8 47.25,12.8 v1(47.9,13.45) 48.15,13.7 IC6.10 ; v1(47.9,17.2) 48.15,16.95 IC6.15
NetC2_2: C2.2 C6.1 IC3.4 IC3.8 R4.1 | length 24.7
  Top Layer w0.9: v3(26.701,21.174) 26.7,16.55 27.45,15.8 v3(32.1,15.8)
  Bottom Layer w0.6: C6.1@30.95,14.475 32.1,14.475
  Bottom Layer w0.9: v3@32.1,16.075 v3(32.1,15.8) 32.1,14.475 32.1,13.85 33.25,12.7 R4.1
  Bottom Layer w1.5: v3@26.7,20.854 v3(26.701,21.174) 29.9,24.374 C2.2
NetC3_2: C3.2 C8.1 D2.K Q2.S SW1.3 | length 18.6
  Bottom Layer w0.4: C3.2 32.281,7.151 32.95,7.821 C8.1 ; C3.2@31.03,7.15 C3.2@31.031,7.151
  Bottom Layer w0.9: SW1.3 Q2.S 25.254,8.525 26.175,8.525 27.55,7.15 C3.2@31.03,7.15
NetC14_1: C14.1 IC5.14 | length 3.6
  Bottom Layer w0.3: IC5.14 C14.1
NetC20_1: C20.1 IC6.14 | length 3.6
  Bottom Layer w0.3: C20.1 IC6.14
NetC21_1: C21.1 IC9.5 R9.2 | length 3.3
  Bottom Layer w0.3: IC9.5 C21.1 R9.2
NetCN1_1: CN1.1 F1.1 | length 2.5
  Bottom Layer w1: F1.1 CN1.1@46.5,9.1
NetD1_A: D1.A IC1.1 L1.2 | length 6.9
  Top Layer w1.5: v3(53.6,30.6) L1.2
  Bottom Layer w0.6: IC1.1 53.3,30.9 v3(53.6,30.6)
  Bottom Layer w0.9: D1.A v3(53.6,30.6)
NetIC1_3: IC1.3 R1.1 R3.2 | length 8.4
  Bottom Layer w0.6: R3.2 46.8,27.15 47.461,27.811 51.8,27.811 ; R1.1 51.8,27.811 ; IC1.3 51.8,27.811
NetIC1_4: IC1.4 IC1.5 L1.1 SW1.1 SW1.2 TP7.1 | length 40.2
  Top Layer w1.5: SW1.2 SW1.2@25.254,11.375 ; SW1.1 35.15,11.25 45.72,21.82 L1.1 v3(48,30.6)
  Bottom Layer w0.6: TP7.1 v3(48,30.6) 48.65,29.95 IC1.5 IC1.4
  Bottom Layer w1.5: SW1.2 SW1.1
NetIC3_2: IC3.2 R5.2 | length 1.9
  Bottom Layer w0.6: IC3.2 32.105,19.115 R5.2
NetIC5_3: IC5.3 IC5.6 R11.2 | length 15
  Top Layer w1: v3(9.3,18.275) v3(9.3,21.125) 10.125,21.125 10.8,21.8 10.8,23.9 9.3,25.4 R11.2
  Bottom Layer w0.45: v3(9.3,18.275) 9.75,18.725 IC5.3 ; v3(9.3,21.125) 9.75,20.675 IC5.6
NetIC6_2: IC6.2 IC6.7 M_Stroke.3 TP6.1 | length 20.1
  Top Layer w1: v3(60.175,12.325) v3(60.175,18.25)
  Bottom Layer w0.45: IC6.7 57.025,13.7 57.732,12.993 ; IC6.2 57.025,16.95 57.732,17.657 ; TP6.1 M_Stroke.3
  Bottom Layer w0.8: 57.732,12.993 58.4,12.325 v3(60.175,12.325) ; 57.732,17.657 58.325,18.25 v3(60.175,18.25)
  Bottom Layer w1: v3@60.1,12.4 M_Stroke.3
NetIC6_3: IC6.3 IC6.6 R8.2 | length 12.3
  Top Layer w1: v3(58.6,13.9) v3(58.6,16.75) R8.2
  Bottom Layer w0.45: IC6.6 58.15,14.35 v3(58.6,13.9) ; IC6.3 58.15,16.3 v3(58.6,16.75)
NetIC6_4: IC6.4 IC6.5 M_Stroke.1 TP18.1 | length 9.5
  Bottom Layer w0.45: M_Stroke.1 TP18.1
  Bottom Layer w1: 55.9,15.325 60.025,15.325 61.1,16.4 M_Stroke.1
NetIC8_29: IC8.29 R19.2 | length 34.4
  Top Layer w0.3: v1(20,29.725) 20.625,29.725 21.625,30.725 27.122,30.725 38.662,19.185 38.662,17.777 v1(39.107,17.332)
  Bottom Layer w0.3: v1(20,29.725) 20.557,29.725 20.807,29.975 IC8.29
  Bottom Layer w0.4: v1@39.1,17.34 40.3,16.14 R19.2
NetIC9_1: IC9.1 Q3.4 | length 2.3
  Bottom Layer w0.3: Q3.4 IC9.1@10.05,8.75
NetIC9_2: IC9.2 R10.2 | length 5
  Bottom Layer w0.3: IC9.2 10.75,9.725 11.16,10.136 11.16,11.136 11.393,11.368 R10.2
NetIC9_3: IC9.3 Q3.5 | length 9.9
  Top Layer w0.3: v1(2.004,8.023) 3.398,8.023 6.05,10.675 v1(9.05,10.675)
  Bottom Layer w0.3: Q3.5 2.004,8.717 v1(2.004,8.023) ; v1(9.05,10.675) IC9.3
NetQ4_G: Q4.G R13.1 T1.C | length 4.9
  Bottom Layer w0.6: R13.1 57.7,28.5 T1.C@60.6,28.5
NetR14_2: R14.2 T1.B | length 40.4
  Bottom Layer w0.3: R14.2 26.4,37.6 26.8,38 52.2,38 55.3,34.9 55.3,30.3 55.752,29.848 58.373,29.848 T1.B
NRST: C13.1 D3.A IC8.7 Prog.1 R7.1 TP8.1 | length 30.4
  Top Layer w0.3: v4(6.025,59.25) 8.05,59.25 9.3,60.5 Prog.1
  Bottom Layer w0.3: Prog.1 10.45,59.349 11.677,58.122 ccw(c35,61) 16,47.17 D3.A 16,42.6 R7.1 C13.1 C13.1@17.4,42.35 ; IC8.7 R7.1
  Bottom Layer w0.4: R7.1@16,42.6 R7.1@16.05,42.65
Rx: IC4.4 IC8.43 | length 21
  Top Layer w0.3: v1(8.2,41.743) 8.2,39.2 12.425,34.975 v1(15,34.975)
  Bottom Layer w0.3: v1(8.2,41.743) IC4.4 ; v1(15,34.975) 15.5,34.475 IC8.43
SensorsOn: IC8.20 R14.1 | length 4.7
  Bottom Layer w0.3: IC8.20 25.675,34.475 26.4,35.2 R14.1
SleepIdx: IC5.1 IC8.41 | length 18.1
  Top Layer w0.3: v1(17,25.05) 18.4,23.65 v1(18.4,16.525)
  Bottom Layer w0.3: IC5.1 11.8,16.701 11.976,16.525 v1(18.4,16.525) ; IC8.41 16.5,25.55 v1(17,25.05)
SleepStr: IC6.1 IC8.25 | length 47
  Top Layer w0.3: v1(20,33.725) 20.657,33.725 21.657,32.725 27.982,32.725 40.117,20.591 41.506,20.591 v1(41.936,20.161)
  Bottom Layer w0.3: v1(20,33.725) 20.666,33.725 21.2,33.191 21.2,32.325 21.55,31.975 IC8.25 ; v1(41.936,20.161) 43.097,19 55.6,19 56.1,18.5 IC6.1
Standby: IC3.6 IC8.23 | length 18.9
  Bottom Layer w0.3: IC8.23 23.872,32.975 25.6,31.247 25.6,22.336 24.938,21.674 24.938,18.437 25.535,17.84 IC3.6
SWCLK: IC8.49 Prog.5 TP9.1 | length 60.8
  Top Layer w0.3: v4(6.025,66.75) 8.95,66.75 9.2,66.5 Prog.5
  Bottom Layer w0.3: Prog.5 9.3,66.5 7.8,65 7.8,57.7 8.9,56.6 8.9,49.393 6.932,47.425 3.425,47.425 1.278,45.278 1.278,28.146 1.976,27.448 7.648,27.448 8.675,28.475 IC8.49
SWCommon1: Control.4 IC8.55 | length 7.7
  Bottom Layer w0.3: Control.4 8.6,32 9.125,31.475 IC8.55
SWCommon2: Control.2 IC8.52 | length 7.5
  Bottom Layer w0.3: Control.2@3.5,29.975 IC8.52
SWDIO: IC8.46 Prog.6 TP10.1 | length 68.1
  Top Layer w0.3: v4(6.025,69.25) 7.95,69.25 9.2,68 Prog.6
  Bottom Layer w0.3: Prog.6 9.1,68 7.3,66.2 7.3,57.472 8.4,56.372 8.4,49.6 6.725,47.925 3.218,47.925 0.778,45.485 0.778,27.939 1.769,26.948 7.659,26.948 9.307,25.3 13.654,25.3 14,25.646 IC8.46
SWMenuLeft: Control.1 IC8.51 | length 5.7
  Bottom Layer w0.3: Control.1 8.3,29 8.775,29.475 IC8.51
SWOkRight: Control.3 IC8.53 | length 5.7
  Bottom Layer w0.3: Control.3 8.267,31 8.792,30.475 IC8.53
SWUpDown: Control.6 IC8.57 | length 8.1
  Bottom Layer w0.3: Control.6 8.1,34 9.625,32.475 IC8.57
Tx: IC8.42 R17.1 | length 21.2
  Top Layer w0.3: v1(9.875,43.045) 9.875,39.525 13.218,36.182 v1(15,36.182)
  Bottom Layer w0.3: v1(9.875,43.045) R17.1 ; v1(15,36.182) 16,35.182 IC8.42
USART1-Rx: IC4.2 Prog.4 R18.1 TP24.1 | length 30.9
  Top Layer w0.3: v4(6.025,64.25) 8.35,64.25 9.1,65 Prog.4
  Bottom Layer w0.3: R18.1 6.77,44.095 7.25,44.575 IC4.2 7.25,47.036 9.4,49.186 9.4,56.807 8.3,57.907 8.3,63.9 9.4,65 Prog.4
USART1-Tx: Prog.3 R17.2 TP23.1 | length 24.8
  Top Layer w0.3: v4(6.025,61.75) 7.65,61.75 9.4,63.5 Prog.3
  Bottom Layer w0.3: R17.2 9.9,45.62 9.9,57.014 8.8,58.114 8.8,62.9 9.4,63.5 Prog.3
V_Sens: C27.2 Encoder.1 Home.1 Index.1 Q4.D TP12.1 | length 127
  Bottom Layer w0.3: TP12.1 5.025,76.25 Index.1 1.85,76.25 1.2,76.9 1.2,82.3 1.9,83 Encoder.1 10.1,83 13,80.1 13,61 ccw(c35,61) 35,39 55.594,39 59.394,42.8 63.5,42.8 65,41.3 65,39.8 63.7,38.5 Home.1
  Bottom Layer w0.6: Q4.D@56.75,31.15 56.75,32.45 57.3,33 61.4,33 62.069,33.669 Home.1
Vbat: C7.1 CN2.2 CN2.3 IC3.5 Q2.D R2.2 R9.1 TP3.1 | length 41.7
  Top Layer w1: CN2.2 CN2.3
  Bottom Layer w0.3: R9.1@15.8,8.225 17.275,8.225 ; 24.05,15 24.05,16.57 ; R2.2 24.05,16.57 ; C7.1 IC3.5 24.05,16.57
  Bottom Layer w1: CN2.2 CN2.3 17.2,15.225 23.825,15.225 ; TP3.1@17.275,14.925 17.275,8.225 17.275,6.7 18.05,5.925 Q2.D@19.375,5.925
pads on no net: CN1.3 IC1.6 IC4.1 IC5.11 IC6.11 IC8.2 IC8.3 IC8.4 IC8.5 IC8.6 IC8.8 IC8.10 IC8.11 IC8.17 IC8.21 IC8.24 IC8.30 IC8.33 IC8.39 IC8.40 IC8.44 IC8.45 IC8.50 IC8.54 IC8.56 IC8.61 IC8.62 IC9.4 Q3.1 Q3.8
copper on no net:
  other v1: 35.5,2.5

## Polygon pours and split planes (outlines as drawn)
GND on Top Layer "TL_GND" (solid, pour order 2): 0,2 0,48.2 cw(c2,48.2) 2,50.2 2.8,50.2 ccw(c2.852,53) 2.9,55.8 2,55.8 cw(c2,57.8) 0,57.8 0,88 cw(c2,88) 2,90 12,90 cw(c12,88) 14,88 14,61 ccw(c35,61) 49.145,45.478 cw(c50.551,43.848) 50.492,46 64,46 cw(c64.001,44.001) 66,44 66,29.65 ccw(c68.056,29.65) 67.947,27.598 cw(c68.001,23.999) 68,20.4 ccw(c68.051,18.348) 66,18.259 66,10.988 cw(c63.981,10.988) 64.409,9.015 cw(c63.45,12.246) 63.917,8.908 ccw(c64.707,3.301) 59.1,4.091 cw(c54.125,5.071) 54.183,0 2,0 cw(c2,2)
GND on Bottom Layer "TL_GND" (solid, pour order 1): 0,2 0,48.2 cw(c2,48.2) 2,50.2 2.8,50.2 ccw(c2.852,53) 2.9,55.8 2,55.8 cw(c2,57.8) 0,57.8 0,88 cw(c2,88) 2,90 12,90 cw(c12,88) 14,88 14,61 ccw(c35,61) 49.145,45.478 cw(c50.551,43.848) 50.492,46 64,46 cw(c64.001,44.001) 66,44 66,29.65 ccw(c68.056,29.65) 67.947,27.598 cw(c68.001,23.999) 68,20.4 ccw(c68.051,18.348) 66,18.259 66,10.988 cw(c63.981,10.988) 64.409,9.015 cw(c63.45,12.246) 63.917,8.908 ccw(c64.707,3.301) 59.1,4.091 cw(c54.125,5.071) 54.183,0 2,0 cw(c2,2)

## Keep-outs
Keep-Out Layer:
  lines w0.1: 64,46 cw(c64,44) 66,44 66,29.6 ccw(c68,29.6) 68,27.6 cw(c68,24) 71.6,24 cw(c68,24) 68,20.4 ccw(c68,18.4) 66,18.4 ; 66,10.988 cw(c64,10.988) 64.667,9.103 cw(c63,13.817) 63.909,8.9 ccw(c64.944,3.056) 59.1,4.091 cw(c54.123,5.072) 54.183,0 2,0 cw(c2,2) 0,2 0,48.2 cw(c2,48.2) 2,50.2 3,50.2 ccw(c3.002,53) 3,55.8 2,55.8 cw(c2,57.8) 0,57.8 0,88 cw(c2,88) 2,90 12,90 cw(c12,88) 14,88 14,61 ccw(c35,61) 49.145,45.478 cw(c50.551,43.847) 50.492,46 66,46 ; 66,11 66,18.408

## Other copper
Bottom Layer:
  region net Vbat: 26.725,16.875 23.925,16.875 23.9,16.85 23.9,16.419 cw(c23.132,16.479) 23.191,15.711 23.655,14.732 24.682,14.732 26.225,16.275 26.725,16.275
  region net B-: 6.8,10.3 6.8,12.925 6.8,13.2 5.6,13.2 5.6,10 6.375,9.225 7.6,9.225 7.6,10.225 6.875,10.225

## Silkscreen, mask and mechanical layers (free items; w line width, h text height)
Top Overlay:
  circle w0.15: c10,3 r2.75
  circle w0.15: c68,24 r2.75
  circle w0.15: c10,87 r2.75
  text "80352106-V4.1.1-20220627" at 12,82.9 h1 r270
  text "WWW.RMBHOLLAND.COM" at 31.325,31.8 h0.7 r270
  text "holland" at 32.859,30.192 h2 r270
  text "rmb" at 34.757,30.192 h6 r270
Bottom Overlay:
  circle w0.15: c10,3 r1.7
  circle w0.15: c10,87 r1.7
  circle w0.15: c68,24 r1.7
  region: 66.98,27.868 ccw(c67.961,29.53) 68,27.6 cw(c67.937,23.937) 71.6,24 69.7,24 ccw(c68,23.981) 66.3,24 ccw(c68.046,24.046) 68,22.3 ccw(c67.993,24.007) 69.7,24 71.6,24 cw(c68.03,23.97) 68,20.4 66.982,20.132 cw(c68,24) 64,24 cw(c68,24)
  region: 0.167,57 3.002,57 cw(c3.002,53) 3.002,49.001 0.167,49.001 cw(c2,48.2) 2,50.2 3.002,50.2 ccw(c3.002,53) 3.002,55.8 2,55.8 cw(c2,57.8)
  region: 4.317,0 ccw(c0.956,5.023) 7,5 10,5 10,4.7 ccw(c10,3) 10,1.3 ccw(c10,3) 10,4.7 10,5 13,5 ccw(c18.708,4.843) 15.683,0
  region: 13.979,88.286 ccw(c18.977,85.007) 13,85 12.236,85 cw(c10.047,86.894) 10,84 10,85.3 ccw(c10,87) 10,88.7 ccw(c10,87) 10,85.3 10,84 cw(c9.961,86.913) 7.764,85 7,85 ccw(c1.292,85.157) 4.317,90 12,90 cw(c12,88)
  lines w0.1: 0.167,57 ccw(c2,57.8) 2,55.8 3.155,55.8 ; 0.167,57 3,57 cw(c3,53) 3,49 0.167,49 cw(c2,48.2) 2,50.2 3.155,50.2 ; 3,50.2 ccw(c3.002,53) 3,55.8 ; 66.98,27.868 ccw(c68,24) 66.982,20.132 ; 66.985,27.877 ccw(c68,29.6) 68,27.6 cw(c68,24) 71.6,24 cw(c68,24) 68,20.4 ccw(c68,18.4) 66.986,20.124 ; 4.317,0 ccw(c1,5) 7,5 13,5 ccw(c19,5) 15.683,0 4.317,0 ; 4.317,90 cw(c1,85) 7,85 13,85 cw(c19,85) 13.98,88.286 ccw(c12,88) 12,90 4.317,90
  lines w0.15: 8.5,89.598 ccw(c10,87) 11.5,89.598
Top Solder:
  region: 69.749,21.869 ccw(c67.946,23.987) 69.749,26.105 ccw(c67.979,24.027) 65.25,24 ccw(c68.017,24.027)
  region: 7.25,87 ccw(c10,87) 10,84.25 ccw(c10,87) 12.75,87 ccw(c10,87) 10,89.75 ccw(c10,87)
  region: 7.25,3 ccw(c10,3) 10,0.25 ccw(c10,3) 12.75,3 ccw(c10,3) 10,5.75 ccw(c10,3)
Mechanical 1:
  lines w0.1: 59.1,4.091 cw(c54.123,5.072) 54.183,0 2,0 cw(c2,2) 0,2 0,48.2 cw(c2,48.2) 2,50.2 3,50.2 ccw(c3.002,53) 3,55.8 2,55.8 cw(c2,57.8) 0,57.8 0,88 cw(c2,88) 2,90 12,90 cw(c12,88) 14,88 14,61 ccw(c35,61) 49.145,45.478 cw(c50.551,43.847) 50.492,46 64,46 cw(c64,44) 66,44 66,29.6 ccw(c68,29.6) 68,27.6 cw(c68,24) 71.6,24 cw(c68,24) 68,20.4 ccw(c68,18.4) 66,18.4 ; 59.117,4.184 cw(c64.944,3.056) 63.909,8.9 ccw(c63,13.817) 64.667,9.103 ccw(c64,10.988) 66,10.988 ; 66,11 66,18.408
Mechanical 2:
  text "V3.2.2 :  Stroke motor pin 2 -> GND. CN2 -> TH type. / V3.4.1: Channel A and B to encoder TIM8" at -0.2,98.1 h1.52

## Dimensions
0,88 to 14,88 on Mechanical 1
64,46 to 54.183,0 on Mechanical 1
0,2 to 66,10.988 on Mechanical 1
2,0 to 2,90 on Mechanical 1

## Text inside footprints (layer, text, board x,y; h text height)
C1: Bottom Overlay "+" at 36.05,23.1 h1 r270
C2: Bottom Overlay "+" at 28.375,27.125 h1 r90
C3: Bottom Overlay "+" at 28.65,6.7 h1
C5: Bottom Overlay "+" at 33.744,34.594 h1 r270
C27: Bottom Overlay "+" at 62.475,33.3 h1 r180
IC5: Bottom Overlay "°" at 11.475,17.894 h2 r180
IC6: Bottom Overlay "°" at 56.475,17.456 h2